# EAGLE board TRANSISTORS_DIODES_CRYSTALS (EAGLE 4.09)

Size 160 x 100 mm. Coordinates in mm from the lower left corner, seen from the top.
Outline: 0,0 160,0 160,100 0,100 0,0
Copper layers used: 

## Footprints (pad centres in the part's own frame; a part is rotated, then mirrored left to right if it is on the bottom)
TO92 = drill 0.813 octagon: 1 -1.27,0; 2 0,1.905; 3 1.27,0
TO220V = drill 1.016 offset: 1 -2.54,-2.54; 2 0,-2.54; 3 2.54,-2.54
TO220 = drill 1.118 offset: 1 -2.54,-6.35; 2 0,-6.35; 3 2.54,-6.35 | hole 3.302: 0,11.176
78XXL = drill 1.016 offset: GND 0,-3.81; IN -2.54,-3.81; OUT 2.54,-3.81 | hole 3.302: 0,11.176
TO18 = drill 0.813 octagon: 1 -1.27,-1.27; 2 1.27,-1.27; 3 1.27,1.27
SOT23 = smd 1 x 1.4: 1 -0.95,-1.1; 2 0.95,-1.1; 3 0,1.1
DO35-10 = drill 0.813 long: A 5.08,0; C -5.08,0
DO35Z10 = drill 0.813 long: A 5.08,0; C -5.08,0
DO35-7 = drill 0.813 long: A 3.81,0; C -3.81,0
DO35-7A = drill 0.813 long: A 3.81,0; C -3.81,0
DO35-7B = drill 0.813 long: A 3.81,0; C -3.81,0
DO35Z7 = drill 0.813 long: A 3.81,0; C -3.81,0
DO41-10 = drill 1.118 long: A 5.08,0; C -5.08,0
DO41Z10 = drill 1.118 long: A 5.08,0; C -5.08,0
DO41-7 = drill 1.118 long: A 3.81,0; C -3.81,0
MELF-MLL41 = smd 2.5 x 3: A 2.625,0; C -2.625,0
MINIMELF = smd 1.4 x 1.8: A 1.7,0; C -1.7,0
MELF-MLL34 = smd 1.4 x 1.8: 1 -1.7,0; 2 1.7,0
LED5MM = drill 0.813 octagon: A -1.27,0; K 1.27,0
LED3MM = drill 0.813 octagon: A -1.27,0; K 1.27,0
SOD80C = smd 1.4 x 1.8: A 1.7,0; C -1.7,0
TO92- = drill 0.813 octagon: 1 -2.54,0; 2 0,0; 3 2.54,0
HC49/S = drill 0.813 round: 1 -2.413,0; 2 2.413,0
HC49U-V = drill 0.813 round: 1 -2.413,0; 2 2.413,0
HC18U-V = drill 0.813 round: 1 -2.54,0; 2 2.54,0
HC49UP = smd 5.334 x 1.93: 1 -4.826,0; 2 4.826,0
SM49 = smd 5.08 x 1.778: 1 -4.826,0; 2 4.826,0
TC26V = drill 0.813 round: 1 -1.27,0; 2 1.27,0
DIL14S = drill 0.813 round: 1 -7.62,-3.81; 7 7.62,-3.81; 8 7.62,3.81; 14 -7.62,3.81
DIL08-4 = drill 0.813 round: 1 -3.81,-3.81; 2 3.81,-3.81; 3 3.81,3.81; 4 -3.81,3.81
SOD80 = smd 1.4 x 1.8: 1 -1.7,0; 2 1.7,0
TO220H = drill 1.118 offset: 1 -2.54,-10.16; 2 0,-10.16; 3 2.54,-10.16 | hole 3.302: 0,4.826
317TL = drill 1.016 offset: 1 -2.54,-3.81; 2 0,-3.81; 3 2.54,-3.81 | hole 3.302: 0,11.176
SOD87 = smd 1.45 x 2.6: 1 -2.445,0; 2 2.445,0

## Placement (x,y rotation side)
E$1  TO92  [TO92]  10.79,88.1 0 top
E$2  TO220V  [TO220V]  42.54,90.64 0 top
E$3  TO220  [TO220]  57.78,76.67 0 top
E$4  78xxL  [78XXL]  86.99,74.13 0 top
E$5  TO18  [TO18]  114.93,81.75 0 top
E$6  SOT23  [SOT23]  123.82,81.75 0 top
E$7  DO35-10  [DO35-10]  13.33,52.54 0 top
E$8  DO35Z10  [DO35Z10]  29.84,52.54 0 top
E$9  DO35-7  [DO35-7]  45.08,52.54 0 top
E$10  DO35-7A  [DO35-7A]  59.05,52.54 0 top
E$11  DO35-7B  [DO35-7B]  73.02,52.54 0 top
E$12  DO35Z7  [DO35Z7]  85.72,52.54 0 top
E$13  DO41-10  [DO41-10]  99.69,52.54 0 top
E$14  DO41Z10  [DO41Z10]  116.2,52.54 0 top
E$15  DO41-7  [DO41-7]  130.17,52.54 0 top
E$16  MELF-MLL41  [MELF-MLL41]  13.33,42.38 0 top
E$17  MINIMELF  [MINIMELF]  29.84,42.38 0 top
E$18  MELF-MLL34  [MELF-MLL34]  45.08,42.38 0 top
E$19  LED5MM  [LED5MM]  100.96,41.11 0 top
E$20  LED3MM  [LED3MM]  114.93,41.11 0 top
E$21  SOD80C  [SOD80C]  74.29,42.38 0 top
E$22  TO92-  [TO92-]  24.76,88.1 0 top
E$23  HC49/S  [HC49/S]  14.6,20.79 0 top
E$24  HC49U-V  [HC49U-V]  32.38,20.79 0 top
E$25  HC18U-V  [HC18U-V]  50.16,20.79 0 top
E$26  HC49UP  [HC49UP]  70.48,20.79 0 top
E$27  SM49  [SM49]  90.8,20.79 0 top
E$28  TC26V  [TC26V]  104.77,20.79 0 top
E$29  DIL14S  [DIL14S]  121.28,20.79 0 top
E$30  DIL08-4  [DIL08-4]  141.6,20.79 0 top
E$31  SOD80  [SOD80]  60.32,42.38 0 top
E$32  TO220H  [TO220H]  71.75,80.48 0 top
E$33  317TL  [317TL]  100.96,74.13 0 top
E$34  SOD87  [SOD87]  88.26,42.38 0 top

## Library data of the parts
E$1 E$4 E$33 = v-reg
E$2 E$3 E$6 = transistor-pnp
E$5 E$32 = linear
E$7-E$17 E$21 = diode
E$18 = smd-ipc
E$19 E$20 = led
E$22 = maxim
E$23-E$30 = crystal
E$31 E$34 = semicon-smd-ipc

## Text on the board
Top: TRANSISTORS & REGULATORS | DIODES | QUARTZ CRYSTAL